# Altium PCB MPPT charger.PcbDoc
Units mm, origin at the board's own origin, x right, y up, seen from the top; angles counter-clockwise.
Board outline 18.44 x 65.58 mm, 2 copper layers (Top Layer, Bottom Layer); 23 components, 15 nets, 59 pads, 82 vias.
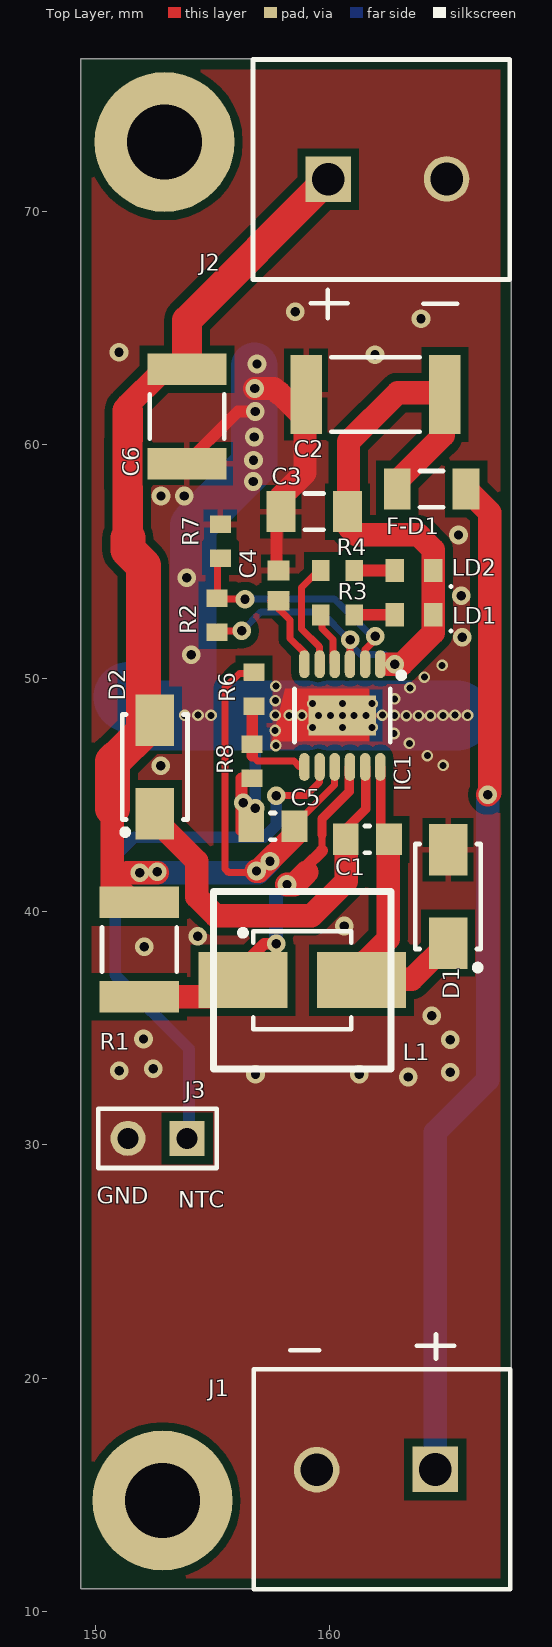
[diagram p0: Top Layer view]
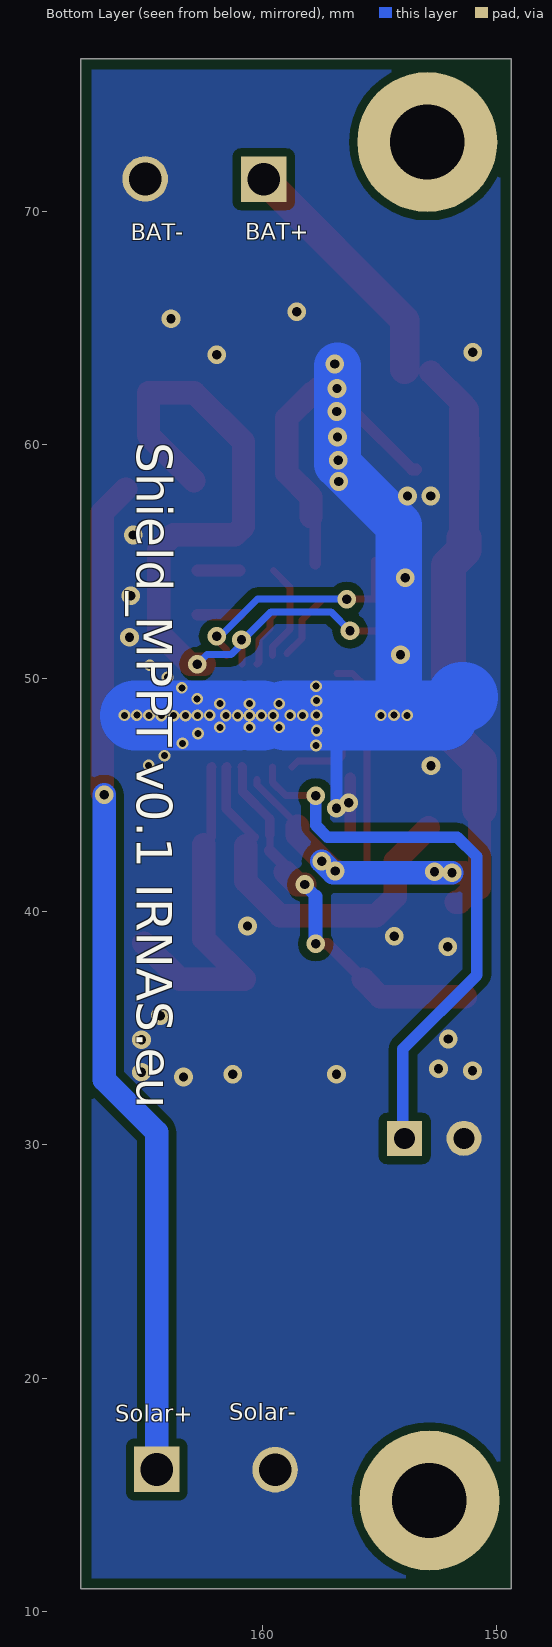
[diagram p1: Bottom Layer view, seen from below]
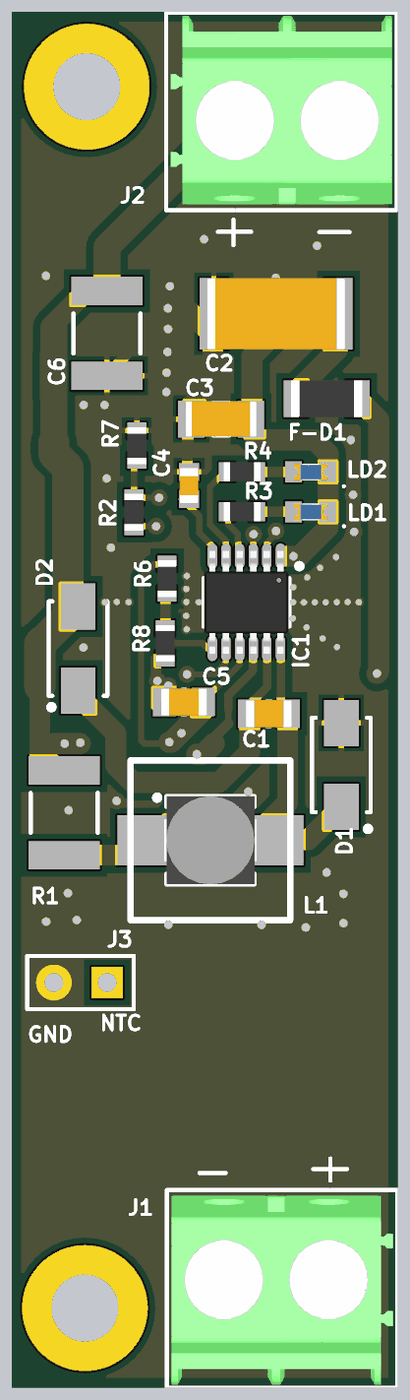
[diagram p2: 3D render of the assembled board from above, using the file's embedded part models]

## Layer stack, top to bottom
Top Solder: solder mask 0.0102, Solder Resist, Dk 3.5
Top Layer: signal copper 0.0356
Dielectric 1: dielectric 0.32, FR-4, Dk 4.8
Bottom Layer: signal copper 0.0356
Bottom Solder: solder mask 0.0102, Solder Resist, Dk 3.5

## Board outline
149.36,10.96 149.36,76.538 167.8,76.538 167.8,10.96

## Design rules (kind name [scope] priority, off if disabled: settings)
Clearance Clearance_polygon [InNamedPolygon('GND')] p1: gap=0.35 ignorepadtopadclearanceinfootprint=FALSE
Clearance [All] p2: gap=0.2 ignorepadtopadclearanceinfootprint=FALSE
PlaneConnect PlaneConnect_pour [InNet('GND')] p1: pad.planeconnectstyle=Relief pad.reliefexpansion=0.508 pad.reliefentries=4 pad.reliefconductorwidth=0.254 pad.reliefairgap=0.254 via.planeconnectstyle=Direct via.reliefexpansion=0.508 via.reliefentries=4 via.reliefconductorwidth=0.254 via.reliefairgap=0
PlaneConnect [All] p2: planeconnectstyle=Relief reliefexpansion=0.508 reliefentries=4 reliefconductorwidth=0.254 reliefairgap=0.254
PolygonConnect [InNet('GND')] p1: thpad.connectstyle=Direct thpad.reliefconductorwidth=0.254 thpad.reliefentries=4 thpad.polygonreliefangle="90 Angle" thpad.airgapwidth=0.254 smdpad.connectstyle=Relief smdpad.reliefconductorwidth=0.254 smdpad.reliefentries=4 smdpad.polygonreliefangle="90 Angle" smdpad.airgapwidth=0.254 via.connectstyle=Direct via.reliefconductorwidth=0.254 via.reliefentries=4 via.polygonreliefangle="90 Angle" via.airgapwidth=0.254
RoutingVias [All] p1: holewidth=0.4 width=0.8 viastyle="Through Hole" minholewidth=0.3 minwidth=0.7 maxholewidth=1 maxwidth=2
SolderMaskExpansion [All] p1: expansion=0.102
Width [All] p1: maxlimit=5 minlimit=0.2 preferedwidth=0.5 minimp=50.000000 maximp=50.000000 favimp=50.000000
29 further rules are at their usual default settings.

## Components (designator, comment, footprint, x,y, rotation, side; value= is the part's Value field where it differs from the comment)
C1 "1uF" "0805 CAP" 161.64,43.08 r0 top
C2 "22uF" "2512 CAP" 161.99,62.15 r0 top
C3 "2.2uF/1206" "1206 CAP" 159.36,57.13 r0 top
C4 "Capacitor/Bridge" "0603 cap" 157.83,53.96 r270 top value=0R
C5 "10uF" "0805 CAP" 157.59,43.64 r0 top
C6 "10uF/1812" "1812 CAP" 153.91,61.21 r90 top
D1 "SS14" SMB 165.1,40.64 r270 top
D2 "SS14" SMB 152.53,46.19 r270 top
F-D1 "Fuse" "1206 RES" 164.4,58.1 r180 top
IC1 "LTC3652" "MSOP12 - EP" 160.57,48.392 r270 top
J1 "Terminal block" "TERMINAL BLOCK - 2 WAYS" 161.97,15.95 r180 top
J2 "Terminal block" "Terminal block - 2 ways" 162.54,71.51 r0 top
J3 "NTC" HDR1X2 153.92,30.27 r180 top value=10k
L1 "5.6uH" FDSD0420-H 158.85,37.05 r0 top
LD1 "LED diode" LED_0603 163.639,52.705 r180 top
LD2 "LED diode" LED_0603 163.639,54.61 r180 top
R1 "0.01R" "1812 RES" 151.87,38.36 r270 top
R2 "47K" "0603 RES" 155.2,52.69 r270 top
R3 "Resistor generic" "0603 RES" 160.36,52.71 r180 top value=1k5
R4 "Resistor generic" "0603 RES" 160.36,54.61 r180 top value=1k5
R6 "100K" "0603 RES" 156.78,49.52 r90 top
R7 "39K" "0603 RES" 155.34,55.86 r90 top
R8 "300K" "0603 RES" 156.69,46.44 r90 top

## Footprints (in the part's own frame and the unit in brackets; to place one, negate y for a bottom-side part, rotate by r counter-clockwise, add the part's x,y. Pads: shape width x height; smd on the part's side, far side on the other; paste and mask are expansions set on the pad)
"0603 cap" [mm]
  rect 0.85x0.95 smd: 1(-0.65,0) 2(0.65,0)
  body extent -0.85,-0.45 0.85,0.45, height 0.8
"0603 RES" [mm] "RES0603 medium"
  rect 0.75x0.9 smd: 1(-0.725,0) 2(0.725,0)
  body extent -0.87,-0.45 0.87,0.45, height 0.4
"0805 CAP" [mm] "0805 cap"
  rect 1.1x1.35 smd: 1(-0.925,0) 2(0.925,0)
  silkscreen extent -0.1,-0.58 0.1,0.58, body extent -1.1,-0.65 1.1,0.65, height 0.8
"1206 CAP" [mm] "1206 cap med"
  rect 1.25x1.75 smd: 1(-1.425,0) 2(1.425,0)
  silkscreen extent -0.4,-0.77 0.4,0.77, body extent -1.7,-0.85 1.7,0.85, height 0.7
"1206 RES" [mm] "RES1206 med"
  rect 1.15x1.75 smd: 1(-1.475,0) 2(1.475,0)
  silkscreen extent -0.5,-0.77 0.5,0.77, body extent -1.7,-0.87 1.7,0.87, height 0.55
"1812 CAP" [mm] "1812 CAP med"
  rect 1.35x3.4 smd: 1(-2.025,0) 2(2.025,0)
  silkscreen extent -0.95,-1.6 0.95,1.6, body extent -2.35,-1.7 2.35,1.7, height 2
"1812 RES" [mm] "1812 RES med"
  rect 1.35x3.4 smd: 1(-2.025,0) 2(2.025,0)
  silkscreen extent -0.95,-1.6 0.95,1.6, body extent -2.35,-1.7 2.35,1.7, height 0.6
"2512 CAP" [mm] "2512 CAP med"
  rect 1.35x3.4 smd: 1(-2.975,0) 2(2.975,0)
  silkscreen extent -1.9,-1.6 1.9,1.6, body extent -3.3,-1.7 3.3,1.7, height 3
FDSD0420-H [mm] "Murata FDSD0420-H SMD Inductor"
  rect 3.81x2.4 smd: 1(-2.54,0) 2(2.54,0)
  silkscreen extent -2.66,-2.1 2.1,2.16, body extent -2.2,-2.1 2.2,2.1, height 2.1
HDR1X2 [mm] "Connector; Header; 2 Position"
  rect 1.5x1.5 hole 0.9: 1(0,0)
  round 1.5 hole 0.9: 2(2.54,0)
  silkscreen extent -1.27,-1.27 3.81,1.27
LED_0603 [mm] "LED diode 0603"
  rect 0.8x1 smd: 1(-0.825,0) 2(0.825,0)
  silkscreen extent -1.64,0.64 -1.54,0.74, body extent -0.8,-0.4 0.8,0.4, height 0.6
"MSOP12 - EP" [mm] "MSOP, 12-Leads, Body 4,00x3,00mm, Pitch 0,65mm, Thermal Pad 2,90x1,70mm, IPC Medium Density"
  oval 1.2x0.45 smd: 1(-2.2,1.625) 2(-2.2,0.975) 3(-2.2,0.325) 4(-2.2,-0.325) 5(-2.2,-0.975) 6(-2.2,-1.625) 7(2.2,-1.625) 8(2.2,-0.975) 9(2.2,-0.325) 10(2.2,0.325) 11(2.2,0.975) 12(2.2,1.625)
  rect 1.7x2.9 smd: 13(0,0)
  silkscreen extent -1.85,-2.05 1.15,2.65, body extent -2.45,-2.02 2.45,2.02, height 1.1
SMB [mm] "SMB diode SS14"
  rect 2.2x1.65 smd: 1(-2,0) 2(2,0)
  silkscreen extent -2.25,-1.4 3.17,1.4, body extent -2.25,-1.4 2.25,1.39, height 2.3
"TERMINAL BLOCK - 2 WAYS" [mm]
  rect 1.95x1.95 / inner round 1.95 / far side rect 1.95x1.95 hole 1.4: 1(-2.58,-0.13)
  round 1.95 hole 1.4: 2(2.5,-0.12)
  silkscreen extent -5.8,-4.43 5.2,5, body extent -5.59,-4.15 4.98,4.85, height 12.4
"Terminal block - 2 ways" [mm]
  rect 1.95x1.95 / inner round 1.95 / far side rect 1.95x1.95 hole 1.4: 1(-2.58,-0.13)
  round 1.95 hole 1.4: 2(2.5,-0.12)
  silkscreen extent -5.8,-4.43 5.2,5, body extent -5.59,-4.15 4.98,4.85, height 12.4

## Part data
C1: library part 1uF/0805, Capacitance="1 µF", Case Size/Dimension=0805, Dielectric=X7R, Manufacturer=Murata, Manufacturer Part Number=GCM21BR7YA105KA55L, Rated Voltage="35 V", Supplier Part Number 1=2494199, Tolerance (%)="±10 %", ComponentLink1Description=https://datasheet.ciiva.com/11616/product-11616620.pdf, ComponentLink1URL=https://datasheet.ciiva.com/11616/product-11616620.pdf, ComponentLink2Description=https://datasheet.ciiva.com/138/s0717e-138752.pdf, ComponentLink2URL=https://datasheet.ciiva.com/138/s0717e-138752.pdf, ComponentLink3Description=https://datasheet.ciiva.com/138/s0717e-138753.pdf, ComponentLink3URL=https://datasheet.ciiva.com/138/s0717e-138753.pdf, ComponentLink4Description=https://datasheet.ciiva.com/18183/getdatasheetpartid-251151-18183719.pdf, ComponentLink4URL=https://datasheet.ciiva.com/18183/getdatasheetpartid-251151-18183719.pdf, ComponentLink5Description=https://datasheet.ciiva.com/138/s0717e-138751.pdf, ComponentLink5URL=https://datasheet.ciiva.com/138/s0717e-138751.pdf, Pricing 1="5=0.391, 50=0.21, 250=0.162, 500=0.111 (EUR)", Stock 1=3630, Supplier 1=Farnell
C2: library part 22uF/2512, Capacitance="22000000 pF", Case Code=D, Case Style=Molded, Manufacturer=KEMET, Manufacturer Part Number=T491D226K035AT, Operating Temp Range="-55C to 125C", Package / Case=7343-31, Supplier Part Number 1=1457504, Tolerance (+ or -)=10%, Voltage=35VDC, ComponentLink1Description=https://datasheet.ciiva.com/18095/getdatasheetpartid-114912-18095782.pdf, ComponentLink1URL=https://datasheet.ciiva.com/18095/getdatasheetpartid-114912-18095782.pdf, ComponentLink2Description=https://datasheet.ciiva.com/12882/kem-t2005-t491-12882636.pdf, ComponentLink2URL=https://datasheet.ciiva.com/12882/kem-t2005-t491-12882636.pdf, ComponentLink3Description=https://datasheet.ciiva.com/22698/1854511-22698957.pdf, ComponentLink3URL=https://datasheet.ciiva.com/22698/1854511-22698957.pdf, Construction="SMT Chip", DCL="7.7 uA", DF=6%, ESR="0.7 ohm", Failure Rate="Not Required", Insulation="Not Required", Lead Spacing (nom)="Not Required mm", Length W/Weld="Not Required mm", Length W/Weld (max)="Not Required mm", Mounting Style="Surface Mount", Packaging="Tape and Reel", Polarity=Polar, Product Depth (mm)="4.3 mm", Product Diameter (mm)="Not Required mm", Product Height (mm)="2.8 mm", Product Length (mm)="7.3 mm", Rad Hardened=No, Seal="Not Required", Seated Plane Height="Not Required mm", Stock 1=0, Supplier 1=Farnell, Wire Form="Not Required"
C3: Capacitance="2.2 uF", Case Code - in=1206, Case Code - mm=3216, Leakage Current="800 nA", Manufacturer="Vishay Sprague", Manufacturer Part Number=TMCMA1V225MTRF, Maximum Operating Temperature="+ 125 C", Mfr Case Code="A Case", Minimum Operating Temperature="- 55 C", Operating Temperature Range="- 55 C to + 125 C", Package / Case="1206 (3216 metric)", Ripple Current="133 mA", Supplier Part Number 1=2491481, Tolerance="20 %", Voltage Rating="35 V", Brand="Vishay / Sprague", ComponentLink1Description=http://www.mouser.com/ds/2/427/tmcm-515668.pdf, ComponentLink1URL=http://www.mouser.com/ds/2/427/tmcm-515668.pdf, ComponentLink2Description=http://www.farnell.com/datasheets/1948250.pdf, ComponentLink2URL=http://www.farnell.com/datasheets/1948250.pdf, ComponentLink3Description=http://www.vishay.com/docs/40178/tmcm.pdf, ComponentLink3URL=http://www.vishay.com/docs/40178/tmcm.pdf, Dissipation Factor DF=8, ESR="4.4 Ohms", Factory Pack Quantity=2000, Height="1.8 mm", Length="3.2 mm", Packaging=Reel, Pricing 1="5=0.274, 50=0.228, 250=0.166, 500=0.153, 1000=0.14, 2000=0.122, 10000=0.119 (EUR)", Product="Tantalum Solid Surface Mounts", Product Category="Tantalum Capacitors - Solid SMD", RoHS=True, Series=TMCM, Stock 1=209, Supplier 1=Farnell, Termination Style=SMD/SMT, Type="Solid Tantalum Surface Mount Chip Capacitors, Molded Case, Extended Range", Unit Weight="0.000571 oz", Width="1.6 mm"
C4: library part "Capacitor NP", Desc="Cap or Res 0R"
C5: library part 10uF/0805, Capacitance=10µF, Manufacturer=Murata, Manufacturer Part Number=GRM219R61A106KE44D, Operating Temperature="-55°C ~ 85°C", Package / Case="0805 (2012 Metric)", Ratings=-, Standard Package=1, Supplier Part Number 1=1845741, Temperature Coefficient=X5R, Tolerance=±10%, Voltage - Rated=10V, Applications="General Purpose", Catalog Drawings="GRM Series_0805_0.85", Category=Capacitors, ComponentLink1Description=https://datasheet.ciiva.com/5414/product-5414357.pdf, ComponentLink1URL=https://datasheet.ciiva.com/5414/product-5414357.pdf, ComponentLink2Description=https://datasheet.ciiva.com/3777/54grm219r61a106ke4423-3777910.pdf, ComponentLink2URL=https://datasheet.ciiva.com/3777/54grm219r61a106ke4423-3777910.pdf, ComponentLink3Description=https://datasheet.ciiva.com/172/grm219r61a106ke44-01-172352.pdf, ComponentLink3URL=https://datasheet.ciiva.com/172/grm219r61a106ke44-01-172352.pdf, ComponentLink4Description=https://datasheet.ciiva.com/172/grm219r61a106ke44-01-172353.pdf, ComponentLink4URL=https://datasheet.ciiva.com/172/grm219r61a106ke44-01-172353.pdf, ComponentLink5Description=https://datasheet.ciiva.com/172/grm219r61a106ke44-01-172354.pdf, ComponentLink5URL=https://datasheet.ciiva.com/172/grm219r61a106ke44-01-172354.pdf, ComponentLink6Description=https://datasheet.ciiva.com/7719/c02e-7719062.pdf, ComponentLink6URL=https://datasheet.ciiva.com/7719/c02e-7719062.pdf, ComponentLink7Description=https://datasheet.ciiva.com/2989/product-2989663.pdf, ComponentLink7URL=https://datasheet.ciiva.com/2989/product-2989663.pdf, ComponentLink8Description=https://datasheet.ciiva.com/17451/product-17451791.pdf, ComponentLink8URL=https://datasheet.ciiva.com/17451/product-17451791.pdf, Family="Ceramic Capacitors", Featured Product="GA3 Safety Recognized Caps and Hi-Cap MLCC", Features=-, Height - Seated (Max)=-, Lead Spacing=-, Lead Style=-, Mounting Type="Surface Mount, MLCC", Online Catalog="GRM Series", Other Names=490-4735-1, Packaging="Cut Tape (CT)", Pricing 1="10=0.252, 100=0.139, 500=0.102, 1000=0.0939 (EUR)", Product Training Modules="High-Cap Multilayer Ceramic Capacitors", Series=GRM, Size / Dimension="0.079\" L x 0.049\" W (2.00mm x 1.25mm)", Stock 1=1196, Supplier 1=Farnell, Thickness (Max)="0.037\" (0.95mm)"
C6: Capacitance="10 uF", Case Code - in=1812, Case Code - mm=4532, Case Length="4.5 mm", Case Width="3.2 mm", Dielectric=X7R, Manufacturer=KEMET, Manufacturer Part Number=C1812C106K3RACTU, Maximum Operating Temperature="+ 125 C", Minimum Operating Temperature="- 55 C", Package / Case="1812 (4532 metric)", Supplier Part Number 1=1358500, Tolerance="10 %", Voltage Rating DC="25 VDC", Brand=Kemet, Class="Class 2", ComponentLink1Description=https://datasheet.ciiva.com/7807/kem-c1002-x7r-smd-7807557.pdf, ComponentLink1URL=https://datasheet.ciiva.com/7807/kem-c1002-x7r-smd-7807557.pdf, ComponentLink2Description=https://datasheet.ciiva.com/7807/1698758-7807342.pdf, ComponentLink2URL=https://datasheet.ciiva.com/7807/1698758-7807342.pdf, ComponentLink3Description=https://datasheet.ciiva.com/7807/1698758-7807343.pdf, ComponentLink3URL=https://datasheet.ciiva.com/7807/1698758-7807343.pdf, Factory Pack Quantity=1000, Packaging=Reel, Part # Aliases=C1812C106K3RAC7800, Pricing 1="1=3.18, 50=1.5, 100=1.25, 250=1.07 (EUR)", Product="General Type MLCCs", Product Category="Multilayer Ceramic Capacitors MLCC - SMD/SMT", RoHS=Details, Series=C1812C, Stock 1=1665, Supplier 1=Farnell, Termination Style=SMD/SMT, Type="SMD MLCC X7R 6.3 - 250 VDC Commerical Grade"
D1 D2: library part "Diode 1N4148", "High Conductance Fast Diode", Capacitance @ Vr, F=-, Current - Average Rectified (Io)=1A, Current - Reverse Leakage @ Vr="30µA @ 40V", Manufacturer="ON Semiconductor / Fairchild", Manufacturer Part Number=SS14FL, Operating Temperature - Junction="-55°C ~ 125°C", Package / Case=SOD-123F, Supplier Part Number 1=2822564, Voltage - DC Reverse (Vr) (Max)=40V, Voltage - Forward (Vf) (Max) @ If="550mV @ 1A", Category="Discrete Semiconductor Products", ComponentLink1Description=https://www.fairchildsemi.com/datasheets/SS/SS13FL.pdf, ComponentLink1URL=https://www.fairchildsemi.com/datasheets/SS/SS13FL.pdf, Diode Type=Schottky, Family="Diodes - Rectifiers - Single", Mounting Type="Surface Mount", Packaging="Tape & Reel (TR)", Pricing 1="5=0.221, 25=0.214, 100=0.0895, 250=0.0825, 500=0.0654, 1000=0.0483, 5000=0.0404 (EUR)", Reverse Recovery Time (trr)=5.695ns, Series="Automotive, AEC-Q101", Speed="Fast Recovery =  200mA (Io)", Stock 1=2350, Supplier 1=Farnell, Supplier Device Package=SOD-123F
F-D1: library part F-D1, Breaking Capacity at Maximum Voltage Rating="50 A @ 63 V ac/dc", Current Rating="2 A", Manufacturer=Littelfuse, Manufacturer Part Number=0466002,NR, Maximum Operating Temperature=+90°C, Minimum Operating Temperature=-55°C, Operating Temperature Range="-55 ? +90 °C", Supplier Part Number 1=9921877, Voltage Rating="63 V ac/dc", Body Material="Advanced High Temperature Substrate", ComponentLink1Description=http://uk.rs-online.com/webdocs/0785/0900766b80785544.pdf, ComponentLink1URL=http://uk.rs-online.com/webdocs/0785/0900766b80785544.pdf, Dimensions="3.175 x 1.524 x 0.585mm", Fuse Speed=FF, Height=0.585mm, Length=3.175mm, Pricing 1="10=0.591, 100=0.399, 500=0.364, 1000=0.357, 2500=0.349, 5000=0.348, 25000=0.347 (EUR)", Stock 1=8073, Supplier 1=Farnell, Terminal Material="Tin Over Nickel Over Copper", Width=1.524mm
J1 J2: library part "Terminal block - 2ways", "CONN TERM BLOCK 2POS 5MM PCB", Current Rating="17.5 A", Flammability Rating="UL 94 V-0", Manufacturer="Phoenix Contact", Manufacturer Part Number=1715022, Supplier Part Number 1=3714240, Voltage Rating="400 V", Brand="Phoenix Contact", ComponentLink1Description=https://datasheet.ciiva.com/824/1715022-824279.pdf, ComponentLink1URL=https://datasheet.ciiva.com/824/1715022-824279.pdf, ComponentLink2Description=https://datasheet.ciiva.com/15169/getdatasheetpartid-177834-15169625.pdf, ComponentLink2URL=https://datasheet.ciiva.com/15169/getdatasheetpartid-177834-15169625.pdf, ComponentLink3Description=https://datasheet.ciiva.com/16071/1715022-16071966.pdf, ComponentLink3URL=https://datasheet.ciiva.com/16071/1715022-16071966.pdf, ComponentLink4Description=https://datasheet.ciiva.com/14608/70054386-14608122.pdf, ComponentLink4URL=https://datasheet.ciiva.com/14608/70054386-14608122.pdf, Connection Method=Screw, Factory Pack Quantity=250, Length="9.8 mm", Number of Positions="2 Position", Packaging=Bulk, Part # Aliases="MKDS_1,5/_2 MKDS152", Pitch="5 mm", Pricing 1="1=1, 50=0.958, 100=0.932, 250=0.869, 500=0.8, 1000=0.704 (EUR)", Product="Fixed Terminal Blocks", Product Category="Fixed Terminal Blocks", RoHS=True, Series=MKDS, Stock 1=2416, Supplier 1=Farnell, Termination Style="Through Hole", Tradename="COMBICON Control", Unit Weight="0.094181 oz", Wire Gauge Max="10 AWG", Wire Gauge Min="26 AWG", Wire Gauge Range="26 AWG to 10 AWG"
J3: library part "Pin Header 2", Beta=3380
L1: library part Inductor, "Single coil", Current - Saturation=5.7A, Current Rating=4.3A, DC Resistance (DCR)="36 mOhm Max", Frequency - Self Resonant=-, Frequency - Test=100kHz, Inductance=1.5µH, Manufacturer=Murata, Manufacturer Part Number=FDSD0420-H-1R5M=P3, Package / Case=Nonstandard, Supplier Part Number 1=2530091, Tolerance=±20%, Category="Inductors, Coils, Chokes", ComponentLink1Description=http://www.murata.com/~/media/webrenewal/products/inductor/chip/tokoproducts/wirewoundmetalalloytype/m_fdsd0420.ashx, ComponentLink1URL=http://www.murata.com/~/media/webrenewal/products/inductor/chip/tokoproducts/wirewoundmetalalloytype/m_fdsd0420.ashx, ComponentLink2Description=http://www.toko.co.jp/products/pdf/inductors/fdsd0412_fdsd0415_fdsd0420.pdf, ComponentLink2URL=http://www.toko.co.jp/products/pdf/inductors/fdsd0412_fdsd0415_fdsd0420.pdf, ComponentLink3Description=http://www.farnell.com/datasheets/2550152.pdf, ComponentLink3URL=http://www.farnell.com/datasheets/2550152.pdf, Family="Fixed Inductors", Height - Seated (Max)="0.078\" (2.00mm)", Material - Core="Powdered Iron", Mounting Type="Surface Mount", Operating Temperature=-, Packaging="Tape & Reel (TR)", Pricing 1="5=0.926, 50=0.488, 250=0.464, 500=0.408, 1000=0.331, 2000=0.3, 10000=0.293 (EUR)", Q @ Freq=-, Ratings=-, Series=FDSD0420, Shielding=Shielded, Size / Dimension="0.165\" L x 0.165\" W (4.20mm x 4.20mm)", Stock 1=1920, Supplier 1=Farnell, Type=Wirewound
LD1 LD2: "LED", Forward Current If=20mA, Forward Voltage=1.8V, LED Colour=Red, Manufacturer=Multicomp, Manufacturer Part Number=703-0112, Supplier Part Number 1=2112124, Automotive Qualification Standard=-, Bulb Size=-, ComponentLink1Description=https://datasheet.ciiva.com/1244/1758066-1244070.pdf, ComponentLink1URL=https://datasheet.ciiva.com/1244/1758066-1244070.pdf, ComponentLink2Description=https://datasheet.ciiva.com/23621/1626779-23621468.pdf, ComponentLink2URL=https://datasheet.ciiva.com/23621/1626779-23621468.pdf, LED Mounting=SMD, Lens Shape=Rectangular, Luminous Intensity=15mcd, Packaging=Each, Pricing 1="5=0.163, 25=0.139, 100=0.108, 250=0.0887, 500=0.0813, 1000=0.075 (EUR)", Product Range=-, Stock 1=627, Supplier 1=Farnell, Viewing Angle=140°, Wavelength Typ=643nm
R1: Manufacturer=Vishay, Manufacturer Part Number=WSLT2010R0100FEA18, Power Rating=1W, Resistance=0.01ohm, Resistance Tolerance="± 1%", Resistor Case Style="2010 [5025 Metric]", Resistor Element Type="Metal Strip", Supplier Part Number 1=2420772, Temperature Coefficient="± 75ppm/°C", Automotive Qualification Standard=AEC-Q200, ComponentLink1Description=http://www.farnell.com/datasheets/2049204.pdf, ComponentLink1URL=http://www.farnell.com/datasheets/2049204.pdf, ComponentLink2Description=http://www.mouser.com/ds/2/427/wslt2010-73010.pdf, ComponentLink2URL=http://www.mouser.com/ds/2/427/wslt2010-73010.pdf, MSL="MSL 1 - Unlimited", Packaging="Cut Tape", Pricing 1="10=0.985, 100=0.708, 500=0.572, 1000=0.522 (EUR)", Product Range="WSLT2010 Series", Stock 1=12782, Supplier 1=Farnell, SVHC="To Be Advised"
R2: "RESISTOR, 0603, 47K, FULL REEL", Manufacturer=Panasonic, Manufacturer Part Number=ERA-3AEB473V, Rated Power="0.1 W", Resistance="47 kO", Supplier Part Number 1=1577628, Temp Coefficient="±25 ppm/°C", Tolerance (%)="±0.1 %", ComponentLink1Description=https://datasheet.ciiva.com/11808/0900766b80fe20f7-11808041.pdf, ComponentLink1URL=https://datasheet.ciiva.com/11808/0900766b80fe20f7-11808041.pdf, ComponentLink2Description=https://datasheet.ciiva.com/29183/451523-da-01-en-widerstand-0603-era-29183849.pdf, ComponentLink2URL=https://datasheet.ciiva.com/29183/451523-da-01-en-widerstand-0603-era-29183849.pdf, ComponentLink3Description=https://datasheet.ciiva.com/46422/485442-46422694.pdf, ComponentLink3URL=https://datasheet.ciiva.com/46422/485442-46422694.pdf, ComponentLink4Description=https://datasheet.ciiva.com/43455/485442-43455239.pdf, ComponentLink4URL=https://datasheet.ciiva.com/43455/485442-43455239.pdf, ComponentLink5Description=https://datasheet.ciiva.com/46422/485442-46422695.pdf, ComponentLink5URL=https://datasheet.ciiva.com/46422/485442-46422695.pdf, ComponentLink6Description=https://datasheet.ciiva.com/16763/70068849-16763496.pdf, ComponentLink6URL=https://datasheet.ciiva.com/16763/70068849-16763496.pdf, ComponentLink7Description=https://datasheet.ciiva.com/46422/485442-46422696.pdf, ComponentLink7URL=https://datasheet.ciiva.com/46422/485442-46422696.pdf, ComponentLink8Description=https://datasheet.ciiva.com/9189/aoa0000ce26-9189371.pdf, ComponentLink8URL=https://datasheet.ciiva.com/9189/aoa0000ce26-9189371.pdf, ComponentLink9Description=https://datasheet.ciiva.com/48530/era-eng-tds-48530428.pdf, ComponentLink9URL=https://datasheet.ciiva.com/48530/era-eng-tds-48530428.pdf, ComponentLink10Description=https://datasheet.ciiva.com/6137/485442-6137967.pdf, ComponentLink10URL=https://datasheet.ciiva.com/6137/485442-6137967.pdf, ComponentLink11Description=https://datasheet.ciiva.com/9117/aoa0000ce26-9117711.pdf, ComponentLink11URL=https://datasheet.ciiva.com/9117/aoa0000ce26-9117711.pdf, ComponentLink12Description=https://datasheet.ciiva.com/16776/70068849-16776671.pdf, ComponentLink12URL=https://datasheet.ciiva.com/16776/70068849-16776671.pdf, ComponentLink13Description=https://datasheet.ciiva.com/48425/era-eng-tds-48425471.pdf, ComponentLink13URL=https://datasheet.ciiva.com/48425/era-eng-tds-48425471.pdf, Size Code=0603, Stock 1=0, Supplier 1=Farnell
R3 R4: library part 1K5, "1K5", Case Code - in=0805, Case Code - mm=2012, Manufacturer=Vishay, Manufacturer Part Number=CRCW08051K50FKEA, Operating Temperature Range="- 55 C to + 155 C", Package / Case="0805 (2012 metric)", Power Rating="125 mW (1/8 W)", Resistance="1.5 kOhms", Supplier Part Number 1=1652940, Temperature Coefficient="100 PPM / K", Tolerance="1 %", Voltage Rating="150 V", Brand="Vishay / Dale", ComponentLink1Description=https://datasheet.ciiva.com/11809/0900766b80d98b26-11809039.pdf, ComponentLink1URL=https://datasheet.ciiva.com/11809/0900766b80d98b26-11809039.pdf, ComponentLink2Description=https://datasheet.ciiva.com/2467/dcrcwe3-2467185.pdf, ComponentLink2URL=https://datasheet.ciiva.com/2467/dcrcwe3-2467185.pdf, ComponentLink3Description=https://datasheet.ciiva.com/2467/dcrcwe3-2467186.pdf, ComponentLink3URL=https://datasheet.ciiva.com/2467/dcrcwe3-2467186.pdf, ComponentLink4Description=https://datasheet.ciiva.com/2467/dcrcwe3-2467187.pdf, ComponentLink4URL=https://datasheet.ciiva.com/2467/dcrcwe3-2467187.pdf, ComponentLink5Description=https://datasheet.ciiva.com/16291/dcrcwe3-16291272.pdf, ComponentLink5URL=https://datasheet.ciiva.com/16291/dcrcwe3-16291272.pdf, ComponentLink6Description=https://datasheet.ciiva.com/7777/1720486-7777609.pdf, ComponentLink6URL=https://datasheet.ciiva.com/7777/1720486-7777609.pdf, ComponentLink7Description=https://datasheet.ciiva.com/16778/70201119-16778857.pdf, ComponentLink7URL=https://datasheet.ciiva.com/16778/70201119-16778857.pdf, ComponentLink8Description=https://datasheet.ciiva.com/26312/fld-crcw-e3-data-en-26312926.pdf, ComponentLink8URL=https://datasheet.ciiva.com/26312/fld-crcw-e3-data-en-26312926.pdf, ComponentLink9Description=https://datasheet.ciiva.com/3258/dcrcwe3-3258255.pdf, ComponentLink9URL=https://datasheet.ciiva.com/3258/dcrcwe3-3258255.pdf, ComponentLink10Description=https://datasheet.ciiva.com/7777/1697337-7777375.pdf, ComponentLink10URL=https://datasheet.ciiva.com/7777/1697337-7777375.pdf, Factory Pack Quantity=5000, Height="0.45 mm", Length="2 mm", Packaging=Reel, Pricing 1="10=0.0358, 100=0.0246, 500=0.0193, 1000=0.0098 (GBP)", Product="Thick Film Resistors SMD", Product Category="Thick Film Resistors - SMD", RoHS=Details, Series=CRCW, Stock 1=1298, Supplier 1=Farnell, Termination Style=SMD/SMT, Unit Weight="0.000194 oz", Width="1.25 mm"
R6: Case Size="0603 (1608 Metric)", Manufacturer=Panasonic, Manufacturer Part Number=ERA-3AEB104V, Operating Temp Range="-55 to +155 °C", Overload Voltage - Max="150 V", Rated Power="0.1 W", Resistance="100 kO", Supplier Part Number 1=1577632, Temp Coefficient="±25 ppm/°C", Tolerance (%)="±0.1 %", Working Voltage-Nom="75 V", ComponentLink1Description=https://datasheet.ciiva.com/11808/0900766b80fe20f7-11808030.pdf, ComponentLink1URL=https://datasheet.ciiva.com/11808/0900766b80fe20f7-11808030.pdf, ComponentLink2Description=https://datasheet.ciiva.com/29183/451655-da-01-en-widerstand-0603-era-29183868.pdf, ComponentLink2URL=https://datasheet.ciiva.com/29183/451655-da-01-en-widerstand-0603-era-29183868.pdf, ComponentLink3Description=https://datasheet.ciiva.com/5734/485442-5734533.pdf, ComponentLink3URL=https://datasheet.ciiva.com/5734/485442-5734533.pdf, ComponentLink4Description=https://datasheet.ciiva.com/16202/aoa0000ce26-16202041.pdf, ComponentLink4URL=https://datasheet.ciiva.com/16202/aoa0000ce26-16202041.pdf, ComponentLink5Description=https://datasheet.ciiva.com/46422/485442-46422521.pdf, ComponentLink5URL=https://datasheet.ciiva.com/46422/485442-46422521.pdf, ComponentLink6Description=https://datasheet.ciiva.com/9186/aoa0000ce26-9186700.pdf, ComponentLink6URL=https://datasheet.ciiva.com/9186/aoa0000ce26-9186700.pdf, ComponentLink7Description=https://datasheet.ciiva.com/30100/54aoa0000ce26-30100782.pdf, ComponentLink7URL=https://datasheet.ciiva.com/30100/54aoa0000ce26-30100782.pdf, ComponentLink8Description=https://datasheet.ciiva.com/48530/era-eng-tds-48530350.pdf, ComponentLink8URL=https://datasheet.ciiva.com/48530/era-eng-tds-48530350.pdf, ComponentLink9Description=https://datasheet.ciiva.com/16724/70068849-16724943.pdf, ComponentLink9URL=https://datasheet.ciiva.com/16724/70068849-16724943.pdf, ComponentLink10Description=https://datasheet.ciiva.com/46388/485442-46388111.pdf, ComponentLink10URL=https://datasheet.ciiva.com/46388/485442-46388111.pdf, Height - Max="0.55 mm", No. of Terminations=2, Pricing 1="10=0.166, 100=0.0958, 500=0.077, 1000=0.0481 (GBP)", Stock 1=8907, Supplier 1=Farnell, Technology="Thin Film"
R7: Case Code - in=0603, Case Code - mm=1608, Case Height="0.45 mm", Case Length="1.55 mm", Case Width="0.85 mm", Manufacturer=Vishay, Manufacturer Part Number=CRCW060339K0FKEA, Operating Temperature Range="- 55 C to + 155 C", Package / Case="0603 (1608 metric)", Power Rating="100 mW", Resistance="39 kOhms", Supplier Part Number 1=1469804, Temperature Coefficient="100 PPM / K", Tolerance="1 %", Voltage Rating="75 V", Brand="Vishay / Dale", ComponentLink1Description=https://datasheet.ciiva.com/11810/0900766b80d98afc-11810034.pdf, ComponentLink1URL=https://datasheet.ciiva.com/11810/0900766b80d98afc-11810034.pdf, ComponentLink2Description=https://datasheet.ciiva.com/2465/dcrcwe3-2465920.pdf, ComponentLink2URL=https://datasheet.ciiva.com/2465/dcrcwe3-2465920.pdf, ComponentLink3Description=https://datasheet.ciiva.com/7841/1697337-7841830.pdf, ComponentLink3URL=https://datasheet.ciiva.com/7841/1697337-7841830.pdf, ComponentLink4Description=https://datasheet.ciiva.com/26316/fld-crcw-e3-data-en-26316550.pdf, ComponentLink4URL=https://datasheet.ciiva.com/26316/fld-crcw-e3-data-en-26316550.pdf, ComponentLink5Description=https://datasheet.ciiva.com/16436/dcrcwe3-16436039.pdf, ComponentLink5URL=https://datasheet.ciiva.com/16436/dcrcwe3-16436039.pdf, ComponentLink6Description=https://datasheet.ciiva.com/16514/dcrcwe3-16514791.pdf, ComponentLink6URL=https://datasheet.ciiva.com/16514/dcrcwe3-16514791.pdf, ComponentLink7Description=https://datasheet.ciiva.com/16768/70201119-16768839.pdf, ComponentLink7URL=https://datasheet.ciiva.com/16768/70201119-16768839.pdf, ComponentLink8Description=https://datasheet.ciiva.com/7841/1697337-7841593.pdf, ComponentLink8URL=https://datasheet.ciiva.com/7841/1697337-7841593.pdf, ComponentLink9Description=https://datasheet.ciiva.com/2465/dcrcwe3-2465918.pdf, ComponentLink9URL=https://datasheet.ciiva.com/2465/dcrcwe3-2465918.pdf, ComponentLink10Description=https://datasheet.ciiva.com/3257/dcrcwe3-3257518.pdf, ComponentLink10URL=https://datasheet.ciiva.com/3257/dcrcwe3-3257518.pdf, ComponentLink11Description=https://datasheet.ciiva.com/2465/dcrcwe3-2465919.pdf, ComponentLink11URL=https://datasheet.ciiva.com/2465/dcrcwe3-2465919.pdf, ComponentLink12Description=https://datasheet.ciiva.com/3257/dcrcwe3-3257519.pdf, ComponentLink12URL=https://datasheet.ciiva.com/3257/dcrcwe3-3257519.pdf, ComponentLink13Description=https://datasheet.ciiva.com/5551/dcrcwe3-109170-5551951.pdf, ComponentLink13URL=https://datasheet.ciiva.com/5551/dcrcwe3-109170-5551951.pdf, Factory Pack Quantity=5000, Packaging=Reel, Product="Thick Film Resistors SMD", Product Category="Thick Film Resistors - SMD", RoHS=Details, Series=CRCW, Stock 1=0, Supplier 1=Farnell, Unit Weight="0.000071 oz"
R8: Manufacturer=Panasonic, Manufacturer Part Number=ERA-3AEB304V, Rated Power="0.1 W", Resistance="300 kO", Supplier Part Number 1=1670209, Temp Coefficient="±25 ppm/°C", Tolerance (%)="±0.1 %", ComponentLink1Description=https://datasheet.ciiva.com/29183/451825-da-01-en-widerstand-0603-era-29183898.pdf, ComponentLink1URL=https://datasheet.ciiva.com/29183/451825-da-01-en-widerstand-0603-era-29183898.pdf, ComponentLink2Description=https://datasheet.ciiva.com/5998/485442-5998805.pdf, ComponentLink2URL=https://datasheet.ciiva.com/5998/485442-5998805.pdf, ComponentLink3Description=https://datasheet.ciiva.com/9183/aoa0000ce26-9183317.pdf, ComponentLink3URL=https://datasheet.ciiva.com/9183/aoa0000ce26-9183317.pdf, ComponentLink4Description=https://datasheet.ciiva.com/22739/485442-22739477.pdf, ComponentLink4URL=https://datasheet.ciiva.com/22739/485442-22739477.pdf, ComponentLink5Description=https://datasheet.ciiva.com/48530/era-eng-tds-48530389.pdf, ComponentLink5URL=https://datasheet.ciiva.com/48530/era-eng-tds-48530389.pdf, ComponentLink6Description=https://datasheet.ciiva.com/5998/485442-5998807.pdf, ComponentLink6URL=https://datasheet.ciiva.com/5998/485442-5998807.pdf, ComponentLink7Description=https://datasheet.ciiva.com/25652/aoa0000ce26-25652696.pdf, ComponentLink7URL=https://datasheet.ciiva.com/25652/aoa0000ce26-25652696.pdf, ComponentLink8Description=https://datasheet.ciiva.com/16760/70068849-16760202.pdf, ComponentLink8URL=https://datasheet.ciiva.com/16760/70068849-16760202.pdf, ComponentLink9Description=https://datasheet.ciiva.com/46422/485442-46422650.pdf, ComponentLink9URL=https://datasheet.ciiva.com/46422/485442-46422650.pdf, ComponentLink10Description=https://datasheet.ciiva.com/46422/485442-46422651.pdf, ComponentLink10URL=https://datasheet.ciiva.com/46422/485442-46422651.pdf, ComponentLink11Description=https://datasheet.ciiva.com/46422/485442-46422652.pdf, ComponentLink11URL=https://datasheet.ciiva.com/46422/485442-46422652.pdf, ComponentLink12Description=https://datasheet.ciiva.com/48425/era-eng-tds-48425454.pdf, ComponentLink12URL=https://datasheet.ciiva.com/48425/era-eng-tds-48425454.pdf, ComponentLink13Description=https://datasheet.ciiva.com/30135/54aoa0000ce26-30135311.pdf, ComponentLink13URL=https://datasheet.ciiva.com/30135/54aoa0000ce26-30135311.pdf, ComponentLink14Description=https://datasheet.ciiva.com/43455/485442-43455391.pdf, ComponentLink14URL=https://datasheet.ciiva.com/43455/485442-43455391.pdf, Pricing 1="10=0.209, 100=0.124, 500=0.0974, 1000=0.0606 (EUR)", Size Code=0603, Stock 1=13349, Supplier 1=Farnell

## Free pads (board coordinates)
  round 6 hole 3.2 unplated: ""(152.86,14.75) ""(152.95,72.97)

## Via types
v1: diameter 0.8, hole 0.4, Top Layer to Bottom Layer, tented both sides, 45 vias
v2: diameter 0.5, hole 0.3, Top Layer to Bottom Layer, tented both sides, 37 vias

## Nets (pads, with @x,y where several pads share a name; then routed paths per layer and width w, separated by ;. In a path a pad name is that pad's centre, name@x,y a point inside that pad or via, vN(x,y) a via of type N, cw(c..) or ccw(c..) an arc to the next point about the centre after c; other vN are vias at no path point)
GND: C2.1 C3.1 C4.1 C5.1 C6.1 D1.1 IC1.13 J1.2 J2.2 J3.2 R7.2 R8.1 | length 51.5
  Top Layer w0.5: C6.1@153.423,58.935 153.603,58.935 156.088,61.42 v1(156.83,61.42) ; C5.1@156.25,43.45 156.25,44.42 R8.1@156.25,45.7 ; C4.1@157.75,54.895 157.75,56.725 C3.1@157.935,56.91
  Top Layer w1: v1(156.82,62.41) 157.63,62.41 157.84,62.2 157.87,62.23 158.97,61.13 158.97,58.795 157.935,57.76 C3.1 C3.1@157.935,56.91
  Bottom Layer w0.5: 151.13,49.53 151.47,49.19 152.273,48.387 ; v1(156.84,44.42) 156.84,47.35 156.98,47.49 156.464,48.006 156.845,48.387 ; v2@159.004,48.387 v2@160.02,48.387 ; v2@160.528,48.387 v2@161.036,48.387
  Bottom Layer w2: v2@154.178,48.387 154.178,56.552 156.798,59.172 v1(156.798,60.33) 156.798,62.41 v1@156.798,63.37
  Bottom Layer w3: 151.41,49.19 151.47,49.19 ; 152.273,48.387 154.178,48.387 156.845,48.387 157.72,48.387 v2@159.004,48.387 ; v2@160.02,48.387 v2@160.528,48.387 ; v2@161.036,48.387 161.586,48.387 162.8,48.387 163.44,48.387 163.47,48.387 164.88,48.387 v2@165.481,48.387
  other v1: 163.4,32.9 156.845,33.02 161.29,33.02 165.2,33.1 151.01,33.17 152.47,33.25 165.2,34.5 152.05,34.53 164.4,35.52 152.08,38.48 154.37,38.93 160.655,39.37 156.32,44.65 152.79,46.24 154.1,51 165.71,51.75 165.66,53.52 153.9,54.3 165.55,56.13 152.8,57.8 153.8,57.8 156.75,58.42 156.76,59.34 156.91,63.46 161.97,63.86 151,63.96 163.937,65.391 158.55,65.7
  other v2: 164.89,46.26 164.21,46.67 157.72,47.11 163.44,47.2 162.78,47.62 157.69,47.75 159.3,47.884 160.57,47.884 161.84,47.884 159.554,48.392 160.062,48.392 160.57,48.392 161.078,48.392 161.586,48.392 163.31,48.39 163.83,48.39 164.35,48.39 153.81,48.4 154.38,48.41 154.94,48.4 157.7,48.41 158.29,48.4 158.83,48.4 162.28,48.41 162.8,48.4 164.88,48.4 165.4,48.41 165.93,48.4 159.3,48.9 160.57,48.9 161.84,48.9 157.7,49.03 162.81,49.11 163.47,49.58 157.72,49.65 164.084,50.038 164.846,50.546
NetC1_1: C1.1 D2.2 IC1.11 | length 15.9
  Top Layer w0.4: C1.1@160.365,43.18 161.57,44.385 161.57,46.167 IC1.11
  Top Layer w1: D2.2@152.897,43.583 154.33,42.15 154.33,40.632 155.149,39.813 159.249,39.813 160.73,41.294 C1.1@160.73,42.815
NetC1_2: C1.2 D1.2 IC1.12 L1.2 | length 14.5
  Top Layer w0.4: IC1.12 162.215,46.172 C1.2@162.215,43.18
  Top Layer w1: C1.2@162.53,42.865 162.53,38.832 160.782,37.084 163.544,37.084 D1.2
NetC2_2: C2.2 C3.2 F-D1.2 IC1.1 IC1.3 LD1.1 LD2.1 R2.2 | length 33.7
  Top Layer w0.3: R2.2@154.94,51.98 154.979,52.019 v1(156.261,52.019) ; IC1.3 160.895,51.484 160.84,51.539 160.91,51.609 v1(160.91,51.64)
  Top Layer w1: v1@162.51,50.587 v1(162.814,50.587) 163.109,50.587 164.464,51.942 LD1.1 LD2.1 164.464,55.5 163.83,56.134 161.191,56.134 160.83,56.495 160.83,60.12 162.94,62.23 164.9,62.23 164.9,60.4 F-D1.2@162.95,58.45
  Bottom Layer w0.3: v1(156.261,52.019) 157.082,52.84 159.65,52.84 160.84,51.65 160.9,51.65 v1(160.91,51.64) 160.91,51.585 160.84,51.515 161.353,51.002 162.399,51.002 v1(162.814,50.587)
NetC4_2: C4.2 IC1.6 | length 2.9
  Top Layer w0.3: C4.2@157.48,53.325 158.324,52.481 158.324,51.696 IC1.6@158.96,51.06
NetC5_2: C5.2 C6.2 D2.1 IC1.9 J2.1 R1.1 R6.2 | length 59.8
  Top Layer w0.3: R6.2@156.81,50.2 156.155,50.2 155.54,49.585 155.54,41.818 155.702,41.656 156.816,41.656 v1(156.89,41.73) ; C5.2@158.56,43.3 158.56,43.74 160.24,45.42 IC1.9@160.24,45.65
  Top Layer w1: 150.71,44.405 150.71,41.01 151.356,41.656 v1@152.64,41.656 ; 150.833,41.133 151.581,40.385 R1.1@151.72,40.385 ; 151.377,61.461 151.377,61.687 C6.2@152.8,63.11
  Top Layer w1.016: v1(156.89,41.73) 156.981,41.73 158.515,43.264 C5.2
  Top Layer w1.27: C6.2 153.91,65.33 J2.1
  Top Layer w1.3: 151.377,55.997 151.377,58.141 151.36,58.158 151.36,60.212 151.377,60.229 151.377,61.461
  Top Layer w1.5: 150.71,44.405 150.71,46.419 150.861,46.57 ; 150.881,46.551 152.04,47.71 152.04,54.82 151.377,55.483 151.377,55.997
  Bottom Layer w1: v1(151.892,41.656) 156.976,41.656 v1(157.47,42.15)
  other v1: 152.64,41.7
NetF-D1_1: F-D1.1 J1.1 | length 43.4
  Top Layer w1: F-D1.1 166.88,57.095 166.88,45.08 v1(166.8,45)
  Bottom Layer w1: J1.1@164.55,16.07 164.55,30.53 166.8,32.78 v1(166.8,45)
NetIC1_2: IC1.2 R2.1 R7.1 | length 10.5
  Top Layer w0.3: R2.1@155.03,53.34 155.21,53.52 R7.1@155.21,55.045 ; R2.1@155.07,53.38 v1(156.4,53.38) ; IC1.2@161.55,50.97 161.55,51.219 161.978,51.648 v1(161.978,51.792) 161.991,51.78 v1@161.976,51.78
  Bottom Layer w0.3: v1(156.4,53.38) 160.234,53.38 161.862,51.752 161.902,51.792 v1(161.978,51.792) 161.978,51.8 v1@162.018,51.84 ; v1@162.018,51.84 161.994,51.816 v1@162.023,51.787
NetIC1_4: IC1.4 R3.2 | length 2.4
  Top Layer w0.3: R3.2@159.549,52.705 159.695,52.559 159.695,52.115 160.16,51.65 160.16,51.329 160.17,51.319 160.17,50.667 IC1.4
NetIC1_5: IC1.5 R4.2 | length 4.3
  Top Layer w0.3: R4.2@159.549,54.61 158.824,53.885 158.824,52.106 159.59,51.34 IC1.5@159.59,50.96
NetIC1_7: IC1.7 R6.1 R8.2 | length 4.4
  Top Layer w0.3: 156.71,46.67 156.94,46.44 158.492,46.44 IC1.7@158.745,46.187
  Top Layer w0.5: 156.71,46.67 R6.1@156.71,48.805
NetIC1_8: IC1.8 J3.1 | length 24.9
  Top Layer w0.3: v1(157.734,44.958) 159.018,44.958 159.595,45.535 IC1.8
  Bottom Layer w0.5: J3.1@154,30.27 154,34.1 150.83,37.27 150.83,42.35 151.66,43.18 157.226,43.18 157.734,43.688 v1(157.734,44.958)
NetIC1_10: IC1.10 L1.1 R1.2 | length 16.5
  Top Layer w0.3: 159.7,42.606 159.7,43.278
  Top Layer w0.4: 159.7,43.278 159.7,43.97 160.87,45.14 160.87,46.167 IC1.10
  Top Layer w0.5: L1.1@155.702,37.084 157.226,38.608 v1(157.734,38.608) ; 159.03,41.67 159.03,41.936 159.7,42.606
  Top Layer w1: R1.2@151.33,36.345 154.963,36.345 L1.1@155.702,37.084
  Top Layer w1.016: v1(158.2,41.15) 158.51,41.15 159.03,41.67
  Bottom Layer w0.5: 157.734,40.64 158.244,41.15 v1(158.2,41.15)
  Bottom Layer w0.6: v1(157.734,38.608) 157.734,40.64
NetLD1_2: LD1.2 R3.1 | length 1.8
  Top Layer w0.5: R3.1@160.999,52.705 LD1.2
NetLD2_2: LD2.2 R4.1 | length 1.8
  Top Layer w0.5: R4.1@160.999,54.61 LD2.2

## Polygon pours and split planes (outlines as drawn)
GND on Bottom Layer "GND" (solid, pour order 15): 149.36,10.96 149.36,76.538 167.8,76.538 167.8,10.96
GND on Top Layer "GND" (solid, pour order 14): 149.36,10.96 149.36,76.538 167.8,76.538 167.8,10.96

## Other copper
Top Layer:
  region net GND: 158.115,49.53 161.685,49.53 161.724,49.491 161.724,47.283 157.773,47.283 157.48,46.99

## Silkscreen, mask and mechanical layers (free items; w line width, h text height)
Top Overlay:
  lines w0.2: 158.33,21.19 159.58,21.19 ; 159.21,66.06 160.79,66.06 ; 159.95,65.42 159.95,66.63 ; 163.76,21.38 165.37,21.38 ; 164.05,66.04 165.49,66.04 ; 164.58,20.83 164.58,21.88
  lines w0.3: 155.04,33.24 155.04,40.86 162.66,40.86 162.66,33.24 155.04,33.24
  text "GND" at 150.04,27.46 h0.7
  text "NTC" at 153.54,27.29 h0.7
Bottom Overlay:
  text "BAT+" at 160.75,68.79 h0.7
  text "BAT-" at 165.67,68.76 h0.7
  text "Shield_MPPT v0.1 IRNAS.eu" at 165.4,60.1 h1.52 r90
  text "Solar-" at 161.44,18.2 h0.7
  text "Solar+" at 166.32,18.12 h0.7
Mechanical 1:
  the board outline again, w0.2

## Dimensions
158.97,10.97 to 167.17,76.47 on Mechanical 1